# Altium PCB UKU205.PcbDoc (part 3 of 3)
Units mm, origin at the board's own origin, x right, y up, seen from the top; angles counter-clockwise.
Board outline 374.65 x 264.35 mm, 2 copper layers (Top Layer, Bottom Layer); 276 components, 443 nets, 1000 pads, 796 vias.
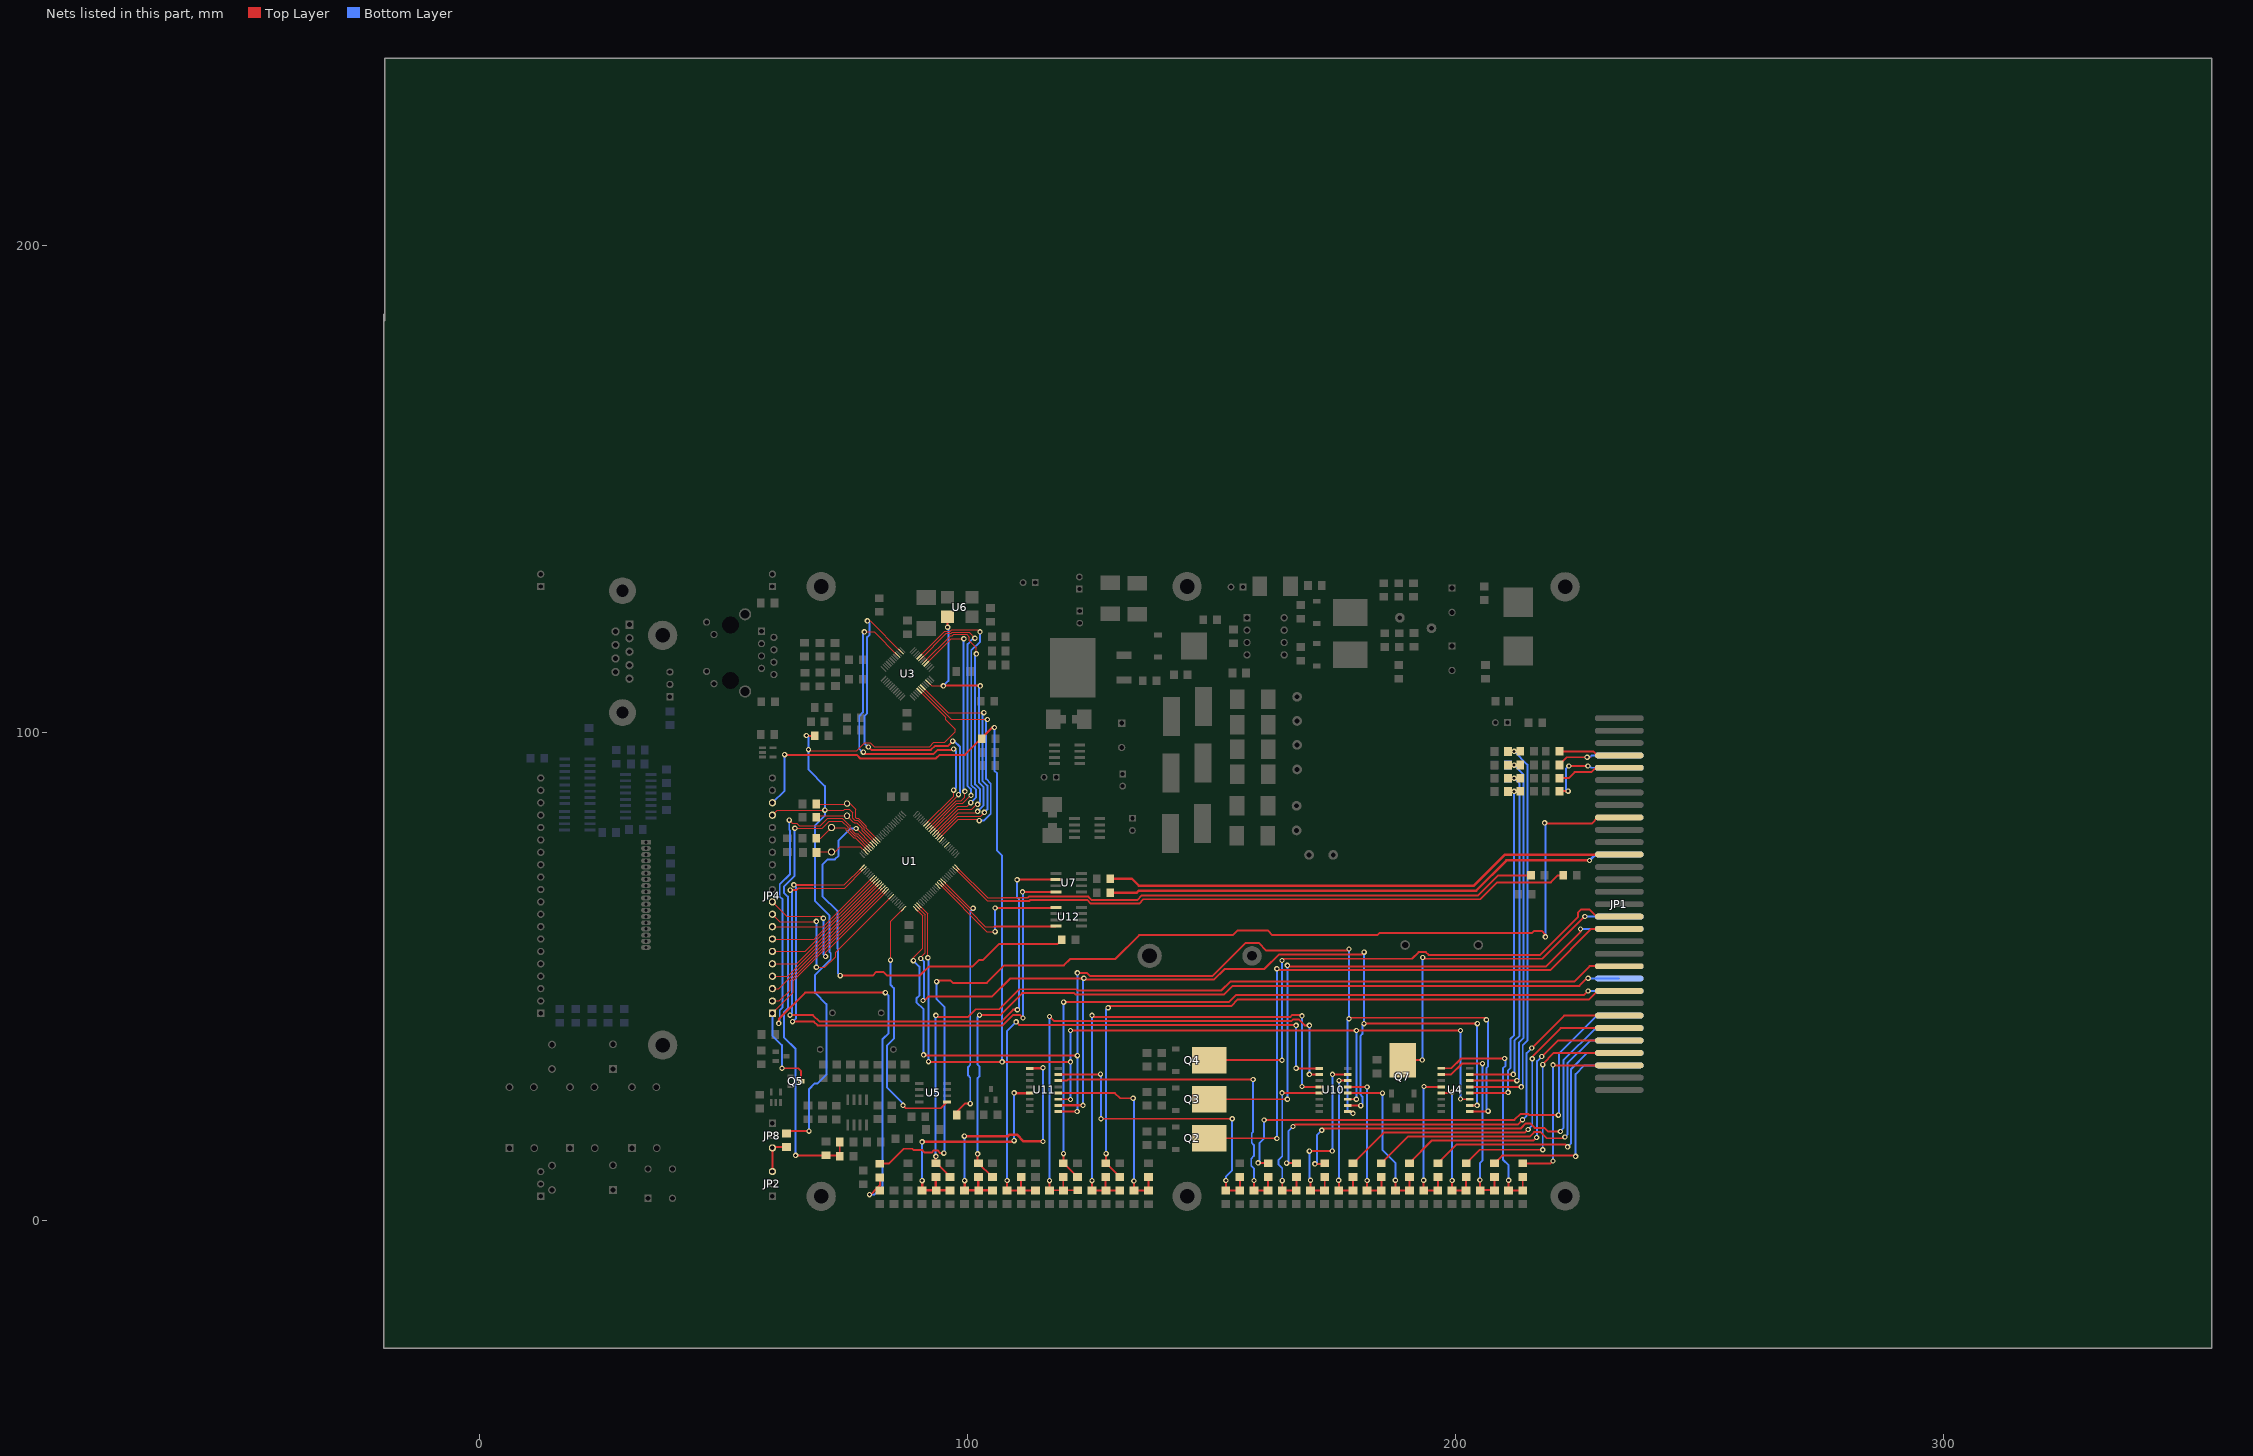
[diagram p3: the nets of this part, all layers, seen from the top]

## Via types
v1: diameter 1.1, hole 0.6, Top Layer to Bottom Layer, 795 vias
v2: diameter 3, hole 2, Top Layer to Bottom Layer, 1 vias

## Nets (pads, with @x,y where several pads share a name; then routed paths per layer and width w, separated by ;. In a path a pad name is that pad's centre, name@x,y a point inside that pad or via, vN(x,y) a via of type N, cw(c..) or ccw(c..) an arc to the next point about the centre after c; other vN are vias at no path point) (continued)
P1_1: U1.94 U3.4 | length 71.5
  Top Layer w0.25: v1(78.85,120.7) 80.866,120.7 U3.4@85.619,115.948 ; U1.94@91.459,81.337 97.15,87.028 v1(97.15,88.25)
  Top Layer w0.4: v1(78.65,96.05) 79,95.7 93.05,95.7 93.8,96.45 96.85,96.45 v1@97.15,96.75
  Bottom Layer w0.4: v1(78.65,96.05) 78.45,96.05 77.8,96.7 77.8,103.45 78.55,104.2 78.55,120.4 v1(78.85,120.7) ; v1(97.15,88.25) 97.65,88.75 97.65,96.2 v1(97.15,96.7)
P1_4: U1.93 U3.2 | length 75.5
  Top Layer w0.25: v1(79.45,122.95) 80.031,122.95 U3.2@86.326,116.655 ; U1.93@91.812,80.948 98.15,87.286 v1(98.15,87.35)
  Top Layer w0.4: v1(79.65,97.1) 80.25,96.5 92.5,96.5 93.35,97.35 96,97.35 v1(96.95,98.3)
  Bottom Layer w0.4: v1(79.45,122.95) 79.85,122.55 79.85,120.05 79.35,119.55 79.35,103.95 78.85,103.45 78.85,97.9 v1(79.65,97.1) ; v1(96.95,98.3) 97.3,98.3 98.45,97.15 98.45,87.65 v1(98.15,87.35)
P1_8: U1.92 U3.40 | length 52.3
  Top Layer w0.25: U3.40@91.523,114.18 96.643,119.3 v1(99.25,119.3) ; U1.92@92.166,80.594 97.672,86.1 98.75,86.1 99.45,86.8 v1(99.45,88)
  Bottom Layer w0.4: v1(99.25,119.3) 99.2,119.25 99.2,88.25 v1(99.45,88)
P1_9: U1.91 U3.43 | length 58.1
  Top Layer w0.25: U3.43@90.463,115.24 95.622,120.4 96.616,120.4 96.816,120.6 100.3,120.6 v1(101.5,119.4) ; U1.91@92.519,80.241 97.829,85.55 99.05,85.55 v1(100.7,87.2)
  Bottom Layer w0.4: v1(100.7,87.2) 100.7,88.4 100,89.1 100,118.2 101.2,119.4 v1(101.5,119.4)
P1_10: U1.90 U3.44 | length 61.7
  Top Layer w0.25: U3.44@90.109,115.594 95.315,120.8 96.45,120.8 96.8,121.15 102.1,121.15 v1(102.55,120.7) ; U1.90@92.873,79.887 97.936,84.95 99.9,84.95 v1(100.65,85.7)
  Bottom Layer w0.4: v1(100.65,85.7) 101.75,86.8 101.75,88.3 100.75,89.3 100.75,116.9 102.55,118.7 v1(102.55,120.7)
P1_14: U1.89 U3.41 | length 58.6
  Top Layer w0.25: U3.41@91.17,114.533 96.536,119.9 96.85,119.9 97.15,120.2 99.8,120.2 100.35,119.65 100.35,118.9 101.8,117.45 v1(101.8,116.2) ; U1.89@93.227,79.534 98.043,84.35 100.85,84.35 101.85,85.35 v1(102.05,85.35)
  Bottom Layer w0.4: v1(101.8,116.2) 101.55,115.95 101.55,89.45 102.55,88.45 102.55,85.85 v1(102.05,85.35)
P1_15: U1.88 U3.34 U6.3 | length 62.6
  Top Layer w0.25: U3.34@91.877,110.397 92.623,109.65 v1(95.05,109.65) ; U1.88@93.58,79.18 98.05,83.65 101.8,83.65 v1(102.05,83.9)
  Top Layer w0.4: v1@95.081,109.681 v1@102.531,109.681 ; v1(95.9,121.65) U6.3@95.9,123.7
  Bottom Layer w0.4: v1(95.05,109.65) 96.05,110.65 v1@96.05,121.65 ; v1(102.05,83.9) 103.3,85.15 103.3,88.85 102.3,89.85 102.3,109.35 v1(102.6,109.65)
P1_16: U1.87 U3.31 | length 47.5
  Top Layer w0.25: U3.31@90.816,109.336 96.002,104.15 v1(103.35,104.15) ; U1.87@93.934,78.826 98.007,82.9 102.7,82.9 103.45,83.65 v1(103.45,83.7)
  Bottom Layer w0.4: v1(103.35,104.15) 103.05,103.85 103.05,90.2 104.05,89.2 104.05,84.3 v1(103.45,83.7)
P1_17: U1.86 U3.30 | length 48.8
  Top Layer w0.25: U3.30@90.463,108.983 96.695,102.75 v1(104.05,102.75) ; U1.86@94.287,78.473 98.114,82.3 102.1,82.3 v1(102.4,82)
  Bottom Layer w0.4: v1(102.4,82) 103.35,82 104.75,83.4 104.75,89.6 103.8,90.55 103.8,102.5 v1(104.05,102.75)
P1_18: JP4.8 U1.32 | length 24.7
  Top Layer w0.25: JP4.8@60,60.28 70.437,60.28 U1.32@80.499,70.341
P1_19: JP4.7 U1.33 | length 25.9
  Top Layer w0.25: JP4.7@60,57.74 68.604,57.74 U1.33@80.852,69.988
P1_20: JP4.6 U1.34 | length 27.2
  Top Layer w0.25: JP4.6@60,55.2 66.772,55.2 U1.34@81.206,69.634
P1_21: JP4.5 U1.35 | length 28.4
  Top Layer w0.25: JP4.5@60,52.66 64.939,52.66 U1.35@81.559,69.281
P1_22: JP4.4 U1.36 | length 29.7
  Top Layer w0.25: JP4.4@60,50.12 63.106,50.12 U1.36@81.913,68.927
P1_23: JP4.3 U1.37 | length 31
  Top Layer w0.25: JP4.3@60,47.58 61.273,47.58 U1.37@82.266,68.573
P1_24: JP4.2 U1.38 | length 33.3
  Top Layer w0.25: JP4.2@60,45.04 61.39,45.04 63.6,47.25 63.6,49.2 U1.38@82.6,68.2
P1_25: JP4.1 Q5.3 U1.39 | length 53.2
  Top Layer w0.25: JP4.1@60,42.5 64.3,46.8 64.3,49.193 U1.39@82.973,67.866
  Top Layer w0.4: v1(61.95,31.25) 65.3,31.25 65.895,30.655 Q5.3@65.895,28.594
  Bottom Layer w0.4: JP4.1@60,42.5 60,37.95 61.95,36 v1(61.95,31.25)
P1_26: JP4.10 U1.40 | length 38.4
  Top Layer w0.25: JP4.10@60,65.36 62.91,62.45 70,62.45 v1(70.45,62) ; v1(70.9,54.15) 70.9,55.05 83.327,67.477 U1.40@83.327,67.513
  Bottom Layer w0.4: v1(70.45,62) 70.45,54.6 v1(70.9,54.15)
P1_27: JP4.9 U1.43 | length 41.1
  Top Layer w0.25: JP4.9@60,62.82 61.52,61.3 69.05,61.3 v1(69,61.35) ; v1(69,51.95) 70.75,51.95 72.95,54.15 72.95,55.014 U1.43@84.388,66.452
  Bottom Layer w0.4: v1(69,51.95) v1(69,61.35)
P1_30: C25.2 R66.2 R67.1 U1.21 | length 99.7
  Top Layer w0.25: v1(64.6,80.45) 70.2,80.45 71.65,81.9 74.243,81.9 75.5,80.643 75.5,80.234 76.834,78.9 77.243,78.9 U1.21@79.743,76.4
  Top Layer w0.4: v1(64.75,13.4) 64.8,13.4 64.812,13.412 73.738,13.412 73.8,13.475 R66.2@73.8,16.2
  Bottom Layer w0.4: v1(64.6,80.45) 64.55,80.45 64.55,70.7 62.35,68.5 62.35,67.25 63.15,66.45 63.15,43.55 62.4,42.8 62.4,37.55 64.75,35.2 v1(64.75,13.4)
P1_31: R16.1 R25.1 U1.20 | length 137.1
  Top Layer w0.25: v1(63.45,82.1) 64.05,81.5 64.95,81.5 65.5,80.95 69.85,80.95 71.35,82.45 74.45,82.45 74.45,82.4 75.573,81.278 75.9,80.95 75.9,80.4 77,79.3 77.55,79.3 77.695,79.155 U1.20@80.145,76.705
  Top Layer w0.4: v1(61.3,40.45) 61.3,41.35 66.7,46.75 v1(83.15,46.75) ; v1(79.9,5.35) 80.107,5.35 81.481,6.725 82.007,7.25 R25.1@82.007,8.888
  Bottom Layer w0.4: v1(61.3,40.45) 61.5,40.65 61.5,43.15 62.1,43.75 62.1,65.85 61.5,66.45 61.5,68.95 63.6,71.05 63.6,79.95 63.45,80.1 v1(63.45,82.1) ; v1(79.9,5.35) 80.9,5.35 82.6,7.05 82.6,37.25 83.8,38.45 83.8,46.1 v1(83.15,46.75)
P2_0: R54.1 U1.75 | length 122.8
  Top Layer w0.25: U1.75@97.823,72.463 104.085,66.2 107.1,66.2
  Top Layer w0.4: 107.1,66.2 112.3,66.2 112.55,66.45 124.75,66.45 125.5,65.7 134.75,65.7 135.75,66.7 204.65,66.7 208.743,70.793 R54.1@215.488,70.793
P2_1: R55.1 U1.74 | length 130.1
  Top Layer w0.25: U1.74@97.469,72.109 104.028,65.55 107.1,65.55
  Top Layer w0.4: 107.1,65.55 112.65,65.55 112.85,65.75 124.5,65.75 125.25,65 135.15,65 136.05,65.9 205.1,65.9 208.55,69.35 219.55,69.35 220.993,70.793 R55.1@222.088,70.793
P2_6: R34.1 U1.67 | length 53.2
  Top Layer w0.25: U1.67@94.994,69.634 100.578,64.05 v1(101.15,64.05)
  Top Layer w0.4: R34.1@97.788,21.693 97.788,22.338 99.45,24 v1(100.55,24)
  Bottom Layer w0.4: v1(100.55,24) 100.55,29.35 100.1,29.8 100.1,31.5 100.55,31.95 100.55,63.45 v1(101.15,64.05)
P2_7: U1.66 U12.4 | length 27.1
  Top Layer w0.25: U1.66@94.65,69.3 94.655,69.295 100.45,63.5 103.658,60.292 105.558,60.292
  Top Layer w0.4: 105.55,60.3 105.558,60.292 U12.4@118.039,60.292
P2_8: U1.65 U12.1 | length 32.6
  Top Layer w0.25: U1.65@94.273,68.927 U1.65@94.287,68.927 103.964,59.25 v1(105.65,59.25)
  Top Layer w0.4: v1(105.652,64.102) U12.1@118.039,64.102
  Bottom Layer w0.4: v1(105.65,59.25) 105.65,64.1 v1(105.652,64.102)
P2_9: U1.64
P2_10: JP4.18 R82.2 U1.53 U4.11 U10.11 U11.11 | length 316.5
  Top Layer w0.25: U1.53@90.045,64.684 91.85,62.879 v1(91.85,53.9)
  Top Layer w0.4: v1(62.5,95.55) 62.55,95.5 77.25,95.5 78,94.75 93.5,94.75 94.25,95.5 99.45,95.5 105.05,101.1 v1(105.5,101.1) ; v1(92,32.6) 92.05,32.55 v1(121.1,32.55) ; U11.11@118.625,24.895 v1@121.055,24.895 ; v1(121.1,39) v1(201.05,39) ; U10.11@177.925,24.895 179.695,24.895 v1(179.7,24.9) ; v1(201.05,24.95) 201.098,24.902 U4.11@202.92,24.902
  Bottom Layer w0.4: JP4.18@60,85.7 JP4.18@60,85.68 62.5,88.18 v1(62.5,95.55) ; v1(91.85,53.9) 92,53.75 v1(92,32.6) ; v1(105.5,101.1) 105.5,92.25 106.05,91.7 106.05,75.85 107.1,74.8 v1(107.1,32.55) ; v1(121.1,24.85) v1(121.1,39) ; v1(179.7,24.9) v1(179.7,39) ; v1(201.05,24.95) v1(201.05,39)
P2_11: U1.52 U4.10 U10.10 U11.10 | length 223.2
  Top Layer w0.25: U1.52@89.691,64.331 91.3,62.722 91.3,54.95 90.4,54.05 v1(90.4,53.75)
  Top Layer w0.4: v1@90.9,44.9 92,46 105.05,46 108.7,49.65 123.5,49.65 123.75,49.4 150.5,49.4 152.7,51.6 160.85,51.6 163.85,54.6 180.85,54.6 v1(181.3,55.05) ; U10.10@177.95,23.65 178,23.6 v1(180.6,23.6) ; v1(181.25,40.4) v1(204.5,40.4) ; U4.10@202.92,23.632 204.432,23.632 v1(204.45,23.65)
  Top Layer w0.5: U11.10@118.625,23.625 123.625,23.625 v1(123.65,23.65)
  Bottom Layer w0.4: v1(90.4,53.75) 91.1,53.05 91.1,45.1 v1@90.9,44.9 ; v1(123.65,23.65) 123.65,49.5 v1(123.85,49.7) ; v1(180.6,23.6) 180.95,23.95 180.95,25.45 180.5,25.9 180.5,37.85 180.95,38.3 180.95,40.1 v1(181.25,40.4) ; v1@181.234,40.384 181.234,54.984 v1(181.3,55.05) ; v1(204.45,23.65) 204.45,40.35 v1(204.5,40.4)
  other v1: 90.85,45.15
P2_12: U1.51 U4.9 U10.9 U11.9 | length 243.4
  Top Layer w0.25: v1(88.9,53.3) 88.9,53.95 90.8,55.85 90.8,62.515 U1.51@89.337,63.977
  Top Layer w0.4: v1(91,34) 91.15,33.85 v1(122.5,33.85) ; U11.9@118.55,22.35 122.4,22.35 v1(122.45,22.4) ; v1(122.5,50.8) 124.45,50.8 125.1,50.15 150.2,50.15 157,56.95 159.65,56.95 161.25,55.35 177.85,55.35 v1(178.2,55.7) ; U10.9@177.925,22.355 178.645,22.355 v1(179,22) ; v1(178.2,41.4) 178.4,41.6 205.95,41.6 v1(206.35,41.2) ; U4.9@202.92,22.362 206.612,22.362 v1(206.7,22.45)
  Bottom Layer w0.4: v1(88.9,53.3) 90.1,52.1 90.1,46.15 89.5,45.55 89.5,44.8 91,43.3 v1(91,34) ; v1(122.45,22.4) 122.5,22.45 v1(122.5,50.8) ; v1(178.2,55.7) v1(178.2,41.4) 177.85,41.05 177.85,22.7 178.55,22 v1(179,22) ; v1(206.35,41.2) 206.7,40.85 206.7,31.65 206.35,31.3 206.35,22.8 v1(206.7,22.45)
P2_13: U1.50 U5.1 | length 53.5
  Top Layer w0.25: v1(84.2,53.4) 84.25,53.45 84.25,61.365 U1.50@86.863,63.977
  Top Layer w0.4: v1(86.75,23.65) 87.35,23.05 94.506,23.05 U5.1@95.796,24.34
  Bottom Layer w0.4: v1(84.2,53.4) 84.2,48.4 84.9,47.7 84.9,37.3 83.45,35.85 83.45,27.35 86.75,24.05 v1(86.75,23.65)
P3_25: U1.27 U7.2 | length 125.9
  Top Layer w0.25: 68.25,68.15 74.772,68.15 U1.27@78.731,72.109
  Top Layer w0.4: v1(63.6,42.15) 68.3,42.15 69.65,40.8 106.9,40.8 109.35,43.25 v1(110.2,43.25) ; v1(63.65,67.75) 64.9,67.75 65.3,68.15 68.25,68.15 ; v1(110.15,69.9) 110.182,69.932 U7.2@118.139,69.932
  Bottom Layer w0.4: v1(63.6,42.15) 64,42.55 64,67.4 v1(63.65,67.75) ; v1(110.15,69.9) 110.15,66.3 110.55,65.9 110.55,43.6 v1(110.2,43.25)
P3_26: U1.26 U7.4 | length 125.5
  Top Layer w0.25: 68.3,68.85 74.765,68.85 U1.26@78.377,72.463
  Top Layer w0.4: v1(64.1,40.8) 68.5,40.8 69.25,40.05 107.2,40.05 109.35,42.2 110.7,42.2 v1(111.35,41.55) ; v1(64.4,68.85) 68.3,68.85 ; v1(111.25,67.4) 111.258,67.392 U7.4@118.139,67.392
  Bottom Layer w0.4: v1(64.1,40.8) 64.85,41.55 64.85,68.4 v1(64.4,68.85) ; v1(111.25,67.4) 111.35,67.3 v1(111.35,41.55)
P4_28: U1.82
P4_29: U1.85
PROG_RESET: 
PROG_SET: 
PWM1: JP1.23 R40.1 | length 107.5
  Top Layer w0.5: R40.1@129.262,70.107 133.693,70.107 135.1,68.7 203.8,68.7 210.15,75.05 JP1.23@233.5,75.05
PWM2: JP1.24 R41.1 | length 107.6
  Top Layer w0.5: R41.1@129.262,67.207 134.607,67.207 135.05,67.65 204.25,67.65 210.45,73.85 v1(227.5,73.85)
  Bottom Layer w0.5: v1(227.5,73.85) 228.725,75.075 JP1.24@233.589,75.075
R1: JP1.35 Q2.4 | length 122.6
  Top Layer w0.4: Q2.4@149.521,16.903 149.524,16.9 163.4,16.9 163.45,16.85 v1(163.4,16.85) ; v1(163.4,51.65) 163.7,51.35 219.4,51.35 227.875,59.825 JP1.35@233.589,59.825
  Bottom Layer w0.4: v1(163.4,16.85) v1(163.4,51.65)
R2: JP1.36 Q3.4 | length 115.1
  Top Layer w0.4: Q3.4@149.521,24.903 157.597,24.903 157.6,24.9 v1(165.55,24.9) ; v1(165.55,52.35) 165.75,52.15 218.6,52.15 225.65,59.2 v1(225.65,59.8)
  Bottom Layer w0.4: v1(165.55,24.9) v1(165.55,52.35) ; v1(225.65,59.8) 225.675,59.825 JP1.36@233.589,59.825
R3: JP1.33 Q4.4 | length 110.3
  Top Layer w0.4: Q4.4@149.521,32.903 156.547,32.903 156.55,32.9 v1(164.45,32.9) ; v1(164.45,53.35) 164.8,53.7 191.1,53.7 192.45,55.05 193.95,55.05 194.5,54.5 217.35,54.5 225.15,62.3 225.15,63.2 225.7,63.75 227.5,63.75 228.85,62.4 JP1.33@233.55,62.4
  Bottom Layer w0.4: v1(164.45,32.9) v1(164.45,53.35)
R4: JP1.34 Q7.4 | length 69.4
  Top Layer w0.4: Q7.4@189.197,32.921 193.171,32.921 v1(193.2,32.95) ; v1(193.3,53.95) 193.55,53.7 217.8,53.7 226.45,62.35 v1(226.55,62.35)
  Bottom Layer w0.4: v1(193.2,32.95) 192.95,32.95 193.3,33.3 v1(193.3,53.95) ; v1(226.55,62.35) 226.575,62.325 JP1.34@233.589,62.325
RES: D2.1 JP4.17 R81.1 U1.17 U3.29 | length 164.2
  Top Layer w0.25: JP4.17@60,83.14 60.96,84.1 64.25,84.1 64.3,84.15 71.55,84.15 71.6,84.1 ; v1(67.4,96.55) 67.4,96.5 67.6,96.3 77.25,96.3 78.95,98 80.1,98 80.9,97.2 92.2,97.2 93.05,98.05 95.35,98.05 97.5,100.2 97.5,100.7 95.55,102.65 95.55,103.188 U3.29@90.109,108.629 ; 71.55,84.1 74.6,84.1 74.8,84.3 75.75,84.3 76.45,83.6 76.45,82.522 76.913,82.058 77.442,82.058 78.85,80.65 78.85,80.122 U1.17@81.206,77.766
  Top Layer w0.4: D2.1@62.65,18.35 v1(67.5,18.35) ; v1@67.443,99.393 R81.1@68.688,99.393
  Bottom Layer w0.4: v1@67.4,99.35 67.4,92.45 70.75,89.1 70.75,83.05 68.75,81.05 68.75,65.5 71.7,62.55 71.7,55.05 71.95,54.8 71.95,53.6 68.75,50.4 68.75,46.7 71.05,44.4 71.05,29.95 69.25,28.15 68.65,28.15 67.5,27 v1(67.5,18.35)
  other v1: 70.75,84.15 66.95,99.45
RES_BUT: D2.2 JP2.3 JP8.3 | length 7.8
  Top Layer w0.4: JP2.3@60,10.08 JP8.3@60,14.92 60.175,15.095 D2.2@62.909,15.095
RTCX1: C40.2 U1.16 Y2.1 | length 16.9
  Top Layer w0.25: C40.2@69.05,85.4 75.303,85.4 Y2.1@75.401,85.499 ; Y2.1@75.305,85.499 75.901,85.499 77.038,84.362 77.038,82.641 77.22,82.458 77.607,82.458 79.25,80.816 79.25,80.429 U1.16@81.559,78.119
RTCX2: C41.2 U1.18 Y2.2 | length 14.5
  Top Layer w0.25: C41.2@69.05,82.9 69.149,82.999 Y2.2@75.305,82.999 76.408,81.895 76.408,81.892 76.75,81.55 77.25,81.55 78.367,80.433 78.367,79.936 80.852,77.451 U1.18@80.852,77.412
RX0: 
SK1: JP1.7 R92.1 | length 12.5
  Top Layer w0.4: R92.1@221.309,96.214 228.236,96.214 229.05,95.4 JP1.7@233.45,95.4
SK2: JP1.8 R94.1 | length 13.1
  Top Layer w0.4: R94.1@221.3,93.45 222.85,95 227.6,95
  Bottom Layer w0.4: 227.6,95 227.975,95.375 JP1.8@233.589,95.375
  other v1: 227,95
SK3: JP1.9 R96.1 | length 13.2
  Top Layer w0.4: R96.1@221.309,90.714 223.214,90.714 224.45,91.95 227.85,91.95 228.75,92.85 JP1.9@233.589,92.85
SK4: JP1.10 R98.1 | length 17.3
  Top Layer w0.4: R98.1@221.3,88.05 222.55,88.05 v1@222.6,88 ; v1(223.25,93.2) v1@227.5,93.2
  Bottom Layer w0.4: v1@222.6,88 222.55,88 222.575,88.025 222.65,88.1 222.65,92.6 v1(223.25,93.2) ; v1@227.5,93.2 227.85,92.85 JP1.10@233.589,92.85
  other v1: 223.1,88.05 227.15,93.2
T1: JP1.45 R8.2 R17.1 | length 142.2
  Top Layer w0.4: v1@128.4,13.4 128.4,11.75 R17.1@131.15,9 ; v1(128.8,43.65) 129.15,44 154.05,44 155.4,45.35 227.4,45.35 229.15,47.1 JP1.45@233.589,47.1
  Bottom Layer w0.4: v1@128.4,13.4 128.4,43.25 v1(128.8,43.65)
  other v1: 128.4,13.75
T2: JP1.46 R9.2 R18.1 | length 152.1
  Top Layer w0.4: v1@119.65,13.55 119.65,11.65 119.8,11.65 R18.1@122.55,8.9 ; v1(119.7,44.8) 119.75,44.85 153.6,44.85 155,46.25 226.35,46.25 v1(227.2,47.1)
  Bottom Layer w0.4: v1@119.65,13.55 119.65,44.75 v1(119.7,44.8) ; v1(227.2,47.1) JP1.46@233.589,47.1
  other v1: 119.65,13.75
T3: JP1.43 R11.2 R19.1 | length 161.4
  Top Layer w0.4: R11.2@110.95,11.8 111.05,11.8 R19.1@113.9,8.95 ; R11.2@111.014,11.791 111.014,13.464 v1@111.05,13.5 ; v1(112.5,45.45) 112.9,45.85 121.6,45.85 121.85,45.6 153.15,45.6 154.7,47.15 225.55,47.15 226.7,48.3 227.8,48.3 229.15,49.65 JP1.43@233.589,49.65
  Bottom Layer w0.4: v1@111.05,13.5 111.05,38.75 112.5,40.2 v1(112.5,45.45)
  other v1: 111.05,13.7
T3: 
T3: 
T3: 
T4: JP1.44 R115.1 R119.2 | length 169.6
  Top Layer w0.4: v1@102.05,13.4 102.05,11.9 102.15,11.8 102.187,11.763 R119.2@102.25,11.7 ; R119.2@102.214,11.791 105.014,8.991 R115.1@105.114,8.991 ; v1(102.45,42.15) 106.7,42.15 111.2,46.65 121.85,46.65 122.15,46.35 152.55,46.35 154.35,48.15 225.4,48.15 226.95,49.7 v1(227.2,49.7)
  Bottom Layer w0.4: v1@102.05,13.4 102.05,29.25 102.4,29.6 102.4,31.65 102.05,32 102.05,41.75 v1(102.45,42.15) ; v1(227.2,49.7) 227.25,49.65 JP1.44@233.589,49.65
  other v1: 102.05,13.7
T5: JP1.41 R116.1 R120.2 | length 179.3
  Top Layer w0.4: v1@93.4,13.45 93.45,13.4 93.45,11.75 93.656,11.75 R116.1@96.414,8.991 ; v1(93.5,42.1) 93.85,41.75 100.05,41.75 101.65,43.35 106.5,43.35 110.6,47.45 122.25,47.45 122.5,47.2 152.05,47.2 153.85,49 224.35,49 227.525,52.175 JP1.41@233.589,52.175
  Bottom Layer w0.4: v1@93.4,13.45 93.4,42 v1(93.5,42.1)
  other v1: 93.5,13.2
TD1: 
TX0: 
TX0: 
TX0: 
TX0: 
TX0: 
TX0: 
TX0: 
TX0: 
TX0: 
TX0: 
TX0: 
TX0: 
TX0: 
TX0: 
TX0: 
TX0: 
TX0: 
TX0: 
TX0: 
TX0: 
TX0: 
TX0: 
TX0: 
TX0: 
TX0: 
TX0: 
TX0: 
TX0: 
TX0: 
TX0: 
TX0: 
TX0: 
TX0: 
TX0: 
TX0: 
TX0: 
TX0: 
TX0: 
TX0: 
TX0: 
TX0: 
TX0: 
TX0: 
TX0: 
TX0: 
TX0: 
TX0: 
TX0: 
TX0: 
TX0: 
TX0: 
TX0: 
TX0: 
TX0: 
TX0: 
TX0: 
TX0: 
TX0: 
TX0: 
TX0: 
TX0: 
TX0: 
TX0: 
TX0: 
TX0: 
TX0: 
TX0: 
TX0: 
TX0: 
TX0: 
TX0: 
TX0: 
TX0: 
TX0: 
TX0: 
TX0: 
TX0: 
TX0: 
TX0: 
TX0: 
TX0: 
TX0: 
TX0: 
TX0: 
TX0: 
TX0: 
TX0: 
TX0: 
TX0: 
TX0: 
TX0: 
U1: JP1.57 R20.2 | length 39.8
  Top Layer w0.4: R20.2@213.75,11.7 219.45,11.7 v1(220,12.25) ; v1(220,31.95) 220.1,31.85 JP1.57@233.589,31.85
  Bottom Layer w0.4: v1(220,12.25) v1(220,31.95)
U2: 
U2: 
U2: 
U2: 
U2: 
U2: 
U2: 
U2: 
U2: 
U2: JP1.58 R21.2 | length 43.9
  Top Layer w0.4: R21.2@208.007,11.788 209.569,13.35 224.5,13.35 v1(224.65,13.2)
  Bottom Layer w0.4: v1(224.65,13.2) 224.65,30.05 226.45,31.85 JP1.58@233.589,31.85
U3: JP1.55 R22.2 | length 51
  Top Layer w0.4: R22.2@202.207,11.788 204.969,14.55 v1(217.9,14.55) ; v1(217.9,32) 217.9,32.1 220.2,34.4 JP1.55@233.589,34.4
  Bottom Layer w0.4: v1(217.9,14.55) v1(217.9,32)
U4: JP1.56 R83.2 | length 55.9
  Top Layer w0.4: R83.2@196.4,11.8 200.2,15.6 222.55,15.6 v1(223,15.15)
  Bottom Layer w0.4: v1(223,15.15) 223.7,15.85 223.7,31.1 227,34.4 JP1.56@233.589,34.4
U5: JP1.53 R84.2 | length 62.5
  Top Layer w0.4: R84.2@190.6,11.85 195.2,16.45 216.05,16.45 v1(216.65,17.05) ; v1(217.7,33.65) 220.975,36.925 JP1.53@233.589,36.925
  Bottom Layer w0.4: v1(216.65,17.05) 216.75,17.15 216.75,32.7 v1(217.7,33.65)
U6: JP1.54 R85.2 | length 68.8
  Top Layer w0.4: R85.2@184.814,11.791 190.273,17.25 215.25,17.25 216.15,18.15 217.45,18.15 218.7,16.9 222.2,16.9 v1(222.45,17.15)
  Bottom Layer w0.4: v1(222.45,17.15) 222.95,17.65 222.95,32.25 227.625,36.925 JP1.54@233.589,36.925
U7: JP1.51 R86.2 | length 74.3
  Top Layer w0.4: R86.2@179.014,11.791 185.273,18.05 214.25,18.05 v1(214.9,18.7) ; v1(215.75,33.2) 215.75,33.65 221.575,39.475 JP1.51@233.589,39.475
  Bottom Layer w0.4: v1(214.9,18.7) 215.75,19.55 v1(215.75,33.2)
U8: JP1.52 R87.2 | length 88.1
  Top Layer w0.4: v1@171.65,11.65 173.073,11.65 R87.2@173.214,11.791 ; v1(172.6,18.55) 172.6,18.65 172.85,18.9 213.4,18.9 214.45,19.95 215.35,19.95 216.25,19.05 218.2,19.05 218.95,18.3 v1(221.5,18.3)
  Bottom Layer w0.4: v1@171.65,11.65 171.65,17.6 v1(172.6,18.55) ; v1(221.5,18.3) 222.15,18.95 222.15,32.85 228.775,39.475 JP1.52@233.589,39.475
  other v1: 171.2,11.65
U9: JP1.49 R88.2 | length 93.4
  Top Layer w0.4: v1@165.75,11.8 165.759,11.791 R88.2@167.414,11.791 ; v1(166.7,19.3) 167.1,19.7 212.75,19.7 v1(213.75,20.7) ; v1(215.65,35.4) 222.3,42.05 JP1.49@233.589,42.05
  Bottom Layer w0.4: v1@165.75,11.8 165.75,18.35 v1(166.7,19.3) ; v1(213.75,20.7) 214.6,21.55 214.6,34.35 v1(215.65,35.4)
  other v1: 165.4,11.8
U10: JP1.50 R91.2 | length 100.3
  Top Layer w0.4: v1@159.85,11.85 159.909,11.791 R91.2@161.614,11.791 ; v1(160.8,20.65) 212.1,20.65 213.35,21.9 214.9,21.9 215.15,21.65 v1(221.1,21.65) ; R91.2@161.55,11.7 R91.2@161.628,11.778
  Bottom Layer w0.4: v1@159.85,11.85 159.85,15.95 160.8,16.9 v1(160.8,20.65) ; v1(221.1,21.65) 221.2,21.75 221.2,34.25 229,42.05 JP1.50@233.589,42.05
  other v1: 159.55,11.85
UAKB: 
UAKB: 
UAKB: 
UAKB: 
UAKB: 
UAKB: 
UAKB: 
UAKB: 
UAKB: 
UAKB: 
UAKB: 
UAKB: 
UAKB: 
UAKB: 
UAKB: 
UAKB: 
UAKB: 
UAKB: 
UAKB: 
UAKB: 
UAKB: 
UAKB: 
UAKB: 
UAKB: 
UAKB: 
UAKB: 
UAKB: 
UAKB: 
UI1: C4.1 R6.1 R23.2 U11.15 | length 65.7
  Top Layer w0.4: U11.15@118.625,29.975 127.175,29.975 v1(127.25,30.05) ; v1(127.35,20.9) v1(154.25,20.9) ; v1@152.95,8.05 152.95,6.2 152.932,6.2 152.919,6.188 R23.2@155.807,6.188 R6.1@155.807,8.988
  Bottom Layer w0.4: v1(127.25,30.05) 127.35,29.95 v1(127.35,20.9) ; v1@152.95,8.05 152.95,9 154.25,10.3 v1(154.25,20.9)
  other v1: 152.95,8.25
UI2: C5.1 R7.1 R24.2 U11.12 | length 40.5
  Top Layer w0.4: U11.12@118.625,26.165 130.185,26.165 131.25,25.1 v1(133.95,25.1) ; v1@134.1,8 134.102,7.998 C5.1@134.102,6.205 134.119,6.188 R24.2@137.107,6.188 R7.1@137.107,8.988
  Bottom Layer w0.4: v1(133.95,25.1) 134.1,24.95 v1@134.1,8
  other v1: 134.1,8.15
US: JP1.17 R25.2 | length 221.3
  Top Layer w0.4: R25.2@82.007,11.688 83.838,11.688 86.9,14.75 88.7,14.75 89,14.45 90.75,14.45 91.25,13.95 92.65,13.95 93.1,14.4 93.85,14.4 94.4,13.85 v1(95.15,13.85) ; v1(93.65,49) 93.85,49.2 96.55,49.2 97,48.75 103.95,48.75 107.55,52.35 119.75,52.35 121.05,53.65 130.25,53.65 135.15,58.55 154.4,58.55 155.3,59.45 161.6,59.45 162.5,58.55 184,58.55 184.45,59 215.75,59 216.15,59.4 217.7,59.4 218.45,58.65 v1(218.45,58.2) ; v1(218.3,81.55) 218.45,81.4 227.95,81.4 229.225,82.675 JP1.17@233.589,82.675
  Bottom Layer w0.4: v1(93.65,49) 93.65,45.4 95.3,43.75 95.3,14 v1(95.15,13.85) ; v1(218.3,81.55) 218.45,81.4 v1(218.45,58.2)
US1: 
US1: 
US1: 
US1: 
US1: 
US1: 
US1: 
US1: 
US1: 
US1: 
US1: 
US1: 
US1: 
US1: 
US1: 
US1: 
US1: 
US1: 
US1: 
US1: 
US1: 
US1: 
US1: 
US1: 
US1: 
US1: 
US1: 
US1: 
US1: 
US1: 
US1: 
US1: 
USK1: C50.1 R93.2 R111.2 U4.13 | length 84.7
  Top Layer w0.4: U4.13@202.92,27.442 213.492,27.442 v1(213.5,27.45) ; R111.2@210.85,96.2 210.864,96.214 R93.2@213.309,96.214
  Bottom Layer w0.4: C50.1@210.791,96.186 212.036,96.186 v1(212.05,96.2) 214.75,93.5 214.75,36.9 213.8,35.95 213.8,27.75 v1(213.5,27.45)
USK2: C51.1 R95.2 R112.2 U4.14 | length 79.5
  Top Layer w0.4: U4.14@202.92,28.712 202.932,28.7 v1(212.6,28.7) ; R112.2@210.791,93.386 210.82,93.414 R95.2@213.309,93.414
  Bottom Layer w0.4: C51.1@210.791,93.386 212.036,93.386 v1(212.05,93.4) 213.95,91.5 213.95,37.45 213.05,36.55 213.05,29.15 v1(212.6,28.7)
USK3: C52.1 R97.2 R113.2 U4.15 | length 74.4
  Top Layer w0.4: U4.15@202.92,29.982 202.938,30 v1(211.85,30) ; R113.2@210.791,90.686 210.82,90.714 R97.2@213.309,90.714
  Bottom Layer w0.4: C52.1@210.791,90.686 212.036,90.686 v1(212.05,90.7) 213.15,89.6 213.15,37.95 212.15,36.95 212.15,30.35 211.85,30.05 v1(211.85,30)
USK4: C53.1 R99.2 R114.2 U4.12 | length 73.9
  Top Layer w0.4: U4.12@202.922,26.172 210.672,26.172 v1(210.8,26.3) ; R114.2@210.791,87.986 210.82,88.014 R99.2@213.309,88.014
  Bottom Layer w0.4: C53.1@210.791,87.986 v1@212.036,87.986 ; v1(210.8,26.3) 210.8,30.8 211.25,31.25 211.25,37.25 212.036,38.036 v1@212.036,87.986 ; v1(212.05,88) v1@212.036,87.986
UT1: C6.1 D3.2 R8.1 R26.2 U10.4 | length 105.9
  Top Layer w0.4: C6.1@125.494,6.205 125.494,7.994 v1@125.5,8 ; v1(125.5,42.1) 125.85,41.75 166.1,41.75 166.5,42.15 168.4,42.15 v1(168.55,42) ; C6.1@125.55,6.2 125.559,6.191 R26.2@131.214,6.191 ; R8.1@128.314,8.991 128.314,6.227 D3.2@128.35,6.191 ; v1(168.55,27.5) 168.615,27.435 U10.4@172.075,27.435
  Bottom Layer w0.4: v1@125.5,8 v1(125.5,42.1) ; v1(168.55,27.5) v1(168.55,42)
  other v1: 125.5,8.2
UT2: C7.1 D4.2 R9.1 R27.2 U10.2 | length 110.5
  Top Layer w0.4: C7.1@116.75,6.25 116.759,6.241 R27.2@122.564,6.241 ; C7.1@116.794,6.205 116.794,7.744 116.8,7.75 v1@116.8,7.85 ; v1(116.8,41.85) 117.7,40.95 166.45,40.95 166.75,41.25 167.9,41.25 169.1,40.05 v1(170.05,40.05) ; D4.2@119.6,6.3 119.614,6.314 R9.1@119.614,8.991 ; v1(170.05,30) 170.075,29.975 U10.2@172.075,29.975
  Bottom Layer w0.4: v1@116.8,7.85 v1(116.8,41.85) ; v1(170.05,30) v1(170.05,40.05)
  other v1: 116.8,8.2
UT3: C8.1 D5.2 R11.1 R28.2 U10.1 | length 115.2
  Top Layer w0.4: v1@108.1,8.1 108.1,6.223 108.1,6.2 R28.2@113.8,6.2 ; v1(109.95,40.75) 110.55,40.15 167.3,40.15 v1@167.35,40.2 ; D5.2@110.983,6.197 110.983,8.96 R11.1@111.014,8.991 ; v1(167.35,31.25) 167.355,31.245 U10.1@172.075,31.245
  Bottom Layer w0.4: v1@108.1,8.1 108.1,38.9 v1(109.95,40.75) ; v1(167.35,31.25) v1@167.35,40.2
  other v1: 108.1,8.25 167.35,40.05
UT4: C54.1 D1.2 R117.2 R119.1 U11.1 | length 54.3
  Top Layer w0.5: v1(99.35,17.35) 108.3,17.35 108.6,17.65 110.1,17.65 111.5,16.25 v1(115.45,16.25) ; C54.1@99.386,6.209 105.109,6.209 R117.2@105.15,6.25 ; C54.1@99.4,6.209 v1@99.4,8.05 ; R119.1@102.214,8.991 102.214,6.286 D1.2@102.25,6.25 ; U11.1@112.775,31.245 115.345,31.245 v1(115.45,31.35)
  Bottom Layer w0.4: v1(99.35,17.35) 99.4,17.3 v1@99.4,8.05 ; v1(115.45,16.25) v1(115.45,31.35)
  other v1: 99.4,8.2
UT5: C55.1 D8.2 R118.2 R120.1 U11.5 | length 50.6
  Top Layer w0.5: v1(90.7,8.2) 90.7,8.15 90.686,8.136 C55.1@90.686,6.209 96.541,6.209 R118.2@96.55,6.2 ; v1(90.7,16.15) 109.3,16.15 v1(109.55,16.4) ; R120.1@93.514,8.991 93.514,6.266 D8.2@93.583,6.197 ; v1(109.55,26.2) 109.585,26.165 U11.5@112.775,26.165
  Bottom Layer w0.4: v1(90.7,8.2) v1(90.7,16.15) ; v1(109.55,16.4) v1(109.55,26.2)
UU1: C1.1 R12.1 R20.1 U4.1 | length 47.4
  Top Layer w0.4: U4.1@197.07,31.252 199.152,31.252 201.15,33.25 v1(210.1,33.25) ; v1@210.9,8.05 210.9,6.207 C1.1@210.902,6.205 210.907,6.2 213.85,6.2 213.807,6.243 R20.1@213.807,8.988
  Bottom Layer w0.4: v1(210.1,33.25) 210.3,33.05 210.3,31.8 209.75,31.25 209.75,12.55 210.9,11.4 v1@210.9,8.05
  other v1: 210.9,8.3
UU2: C2.1 R13.1 R21.1 U4.2 | length 41.4
  Top Layer w0.4: U4.2@197.07,29.982 199.132,29.982 201.35,32.2 v1(205.55,32.2) ; v1@205,8 205,6.2 205.05,6.25 208,6.25 208.007,6.257 R21.1@208.007,8.988
  Bottom Layer w0.4: v1@205,8 205,11.75 205.55,12.3 v1(205.55,32.2)
  other v1: 205,8.35
UU3: C3.1 R15.1 R22.1 U4.5 | length 28.2
  Top Layer w0.4: U4.5@197.07,26.172 199.172,26.172 v1(199.3,26.3) ; v1@199.35,8 199.323,7.973 199.323,6.226 202.207,6.226 R22.1@202.207,8.988
  Bottom Layer w0.4: v1(199.3,26.3) 199.323,26.277 v1@199.323,7.973 ; v1@199.35,8 v1@199.45,8.1
  other v1: 199.323,8.25
UU4: C43.1 R10.1 R83.1 U4.4 | length 30.6
  Top Layer w0.4: v1@193.5,8.05 193.5,6.15 193.559,6.209 R10.1@196.386,6.209 196.414,6.238 R83.1@196.414,8.991 ; v1(193.55,27.5) 193.608,27.442 U4.4@197.07,27.442
  Bottom Layer w0.4: v1@193.5,8.05 193.5,27.45 v1(193.55,27.5)
  other v1: 193.5,8.3
UU5: C44.1 R14.1 R84.1 U10.12 | length 33.9
  Top Layer w0.4: U10.12@177.96,26.2 U10.12@177.925,26.165 177.94,26.15 v1(185.05,26.15) ; v1@187.7,8.05 C44.1@187.7,6.2 190.577,6.2 190.614,6.238 R84.1@190.614,8.991
  Bottom Layer w0.4: v1(185.05,26.15) 185.05,14.5 187.7,11.85 v1@187.7,8.05
  other v1: 187.7,8.3
UU6: C45.1 R74.1 R85.1 U10.13 | length 30.9
  Top Layer w0.4: U10.13@177.925,27.435 181.865,27.435 v1(181.9,27.4) ; v1@181.9,8.05 C45.1@181.9,6.2 184.8,6.2 184.814,6.214 R85.1@184.814,8.991
  Bottom Layer w0.4: v1@181.9,8.05 v1(181.9,27.4)
  other v1: 181.9,8.25
UU7: C46.1 R75.1 R86.1 U10.14 | length 30
  Top Layer w0.4: v1@176.1,8.05 C46.1@176.1,6.2 178.977,6.2 R75.1@178.986,6.209 179.014,6.238 R86.1@179.014,8.991 ; v1(176.15,28.7) 176.155,28.705 U10.14@177.925,28.705
  Bottom Layer w0.4: v1@176.1,8.05 176.1,28.65 v1(176.15,28.7)
  other v1: 176.05,8.3
UU8: C47.1 R76.1 R87.1 U10.15 | length 37.5
  Top Layer w0.4: v1(170.05,14.25) 170,14.25 170.05,14.3 v1(174.75,14.3) ; v1@170.3,8.05 C47.1@170.3,6.2 170.338,6.238 173.214,6.238 R87.1@173.214,8.991 ; v1(174.8,30) U10.15@177.9,30
  Bottom Layer w0.4: v1(170.05,14.25) 170.05,8.3 v1@170.3,8.05 ; v1(174.75,14.3) 174.8,14.35 v1(174.8,30)
  other v1: 170.3,8.3
UU9: C48.1 R77.1 R88.1 U10.5 | length 34
  Top Layer w0.4: v1(164.45,26.2) 164.485,26.165 U10.5@172.075,26.165 ; v1@164.5,8 C48.1@164.5,6.2 164.509,6.209 R77.1@167.386,6.209 ; R88.1@167.414,8.991 167.414,6.236 R77.1@167.45,6.2
  Bottom Layer w0.4: v1(164.45,26.2) 164.5,26.15 164.5,13.2 163.75,12.45 163.75,11.5 164.5,10.75 v1@164.5,8
  other v1: 164.5,8.2
UU10: C49.1 R78.1 R91.1 U11.14 | length 69.2
  Top Layer w0.4: U11.14@118.625,28.705 120.355,28.705 120.6,28.95 v1(158.55,28.95) ; v1@158.7,7.95 C49.1@158.7,6.2 158.738,6.238 161.614,6.238 R91.1@161.614,8.991
  Bottom Layer w0.4: v1(158.55,28.95) 158.55,18.2 158.25,17.9 158.25,15.95 158.7,15.5 158.7,13.3 158.15,12.75 158.15,11.3 158.7,10.75 v1@158.7,7.95
  other v1: 158.7,8.25
VBAT: D6.2 U1.19 | length 89.9
  Top Layer w0.25: v1(77.15,80.407) U1.19@80.499,77.059
  Top Layer w0.4: v1(73.9,50.25) 80.55,50.25 81.3,51 82.75,51 83.45,50.3 90.25,50.3 92.1,52.15 101.05,52.15 102.3,53.4 103.1,53.4 106.45,56.75 118.454,56.75 D6.2@119.295,57.591
  Bottom Layer w0.4: v1(73.9,50.25) 73.4,50.75 73.4,55.75 73.3,55.85 73.3,63.5 70.25,66.55 70.25,72.95 71.35,74.05 72.8,74.05 73.55,74.8 73.55,77.95 76.007,80.407 v1(77.15,80.407) 77.15,80.45 v1@77.107,80.407
VS: JP1.18 R71.2 | length 211.7
  Top Layer w0.4: R71.2@87.807,11.788 v1@87.807,13.193 ; v1(88.65,46.9) 93.25,46.9 94.65,48.3 96.2,48.3 96.7,47.8 104.3,47.8 107.9,51.4 120.05,51.4 121.35,52.7 130.55,52.7 135.5,57.65 154.8,57.65 155.8,58.65 161.2,58.65 162.15,57.7 184.5,57.7 185,58.2 217,58.2 v1(217.05,58.25) ; v1(217.15,82.65) 217.25,82.55 v1@227.45,82.55
  Bottom Layer w0.4: v1@87.807,13.193 89.4,14.787 89.4,43.5 88.65,44.25 v1(88.65,46.9) ; v1(217.05,58.25) 217.05,82.3 217.275,82.525 217.4,82.65 v1(217.15,82.65) ; v1@227.45,82.55 227.575,82.675 JP1.18@233.589,82.675
  other v1: 87.8,13.5 227.3,82.55
VS: 
VS: 
VS: 
VS: 
VS: 
VS: 
VS: 
VS: 
VS: 
VS: 
VS: 
VS: 
VS: 
VS: 
VS: 
VS: 
VS: 
VS: 
VS: 
VS: 
VS: 
VS: 
VS: 
VS: 
VS: 
VS: 
VS: 
VS: 
VS: 
VS: 
XTAL1: C21.2 U1.22 Y1.1 | length 13.4
  Top Layer w0.25: C21.2@68.988,78.393 69.901,78.393 Y1.1@72.1,80.592 74.844,80.592 75.1,80.336 75.1,80.069 76.669,78.5 76.936,78.5 U1.22@79.438,75.998
XTAL2: C31.2 U1.23 Y1.2 | length 11
  Top Layer w0.25: C31.2@69.037,75.494 69.135,75.592 72.842,75.592 73.95,76.7 78.029,76.7 U1.23@79.084,75.645
pads on no net: J2.1 J2.6 J2.8 J2.9 J2.10 J2.11 J301.0 J301.7 JP1.3 JP1.4 JP1.15 JP1.30 JP1.31 JP1.32 JP1.42 U1.1 U1.2 U1.3 U1.4 U1.5 U1.14 U1.24 U1.44 U1.45 U1.48 U1.49 U1.63 U1.68 U1.69 U1.70 U1.73 U1.81 U1.100 U2.18 U3.1 U3.5 U3.6 U3.8 U3.9 U3.10 U3.11 U3.12 U3.25 U3.33 U3.38 U3.42 U3.45 U3.46 U6.1 U7.1 U7.8 U8.3 U8.4 U8.5 U8.6 U9.1 U9.5 U9.8 U11.2 U11.4 U11.13 U12.5 U13.3 U14.11 U14.12 U14.13 U14.14 U15.3 U15.4 U15.5 U15.6 U19.4 U102.4 U102.8
copper on no net: | length 0.4
  Bottom Layer w0.5: -81.85,-36.5 -81.4,-36.5

## Polygon pours and split planes (outlines as drawn)
+3V3 on Top Layer (hatched 90Degree grid 0.1 track 0.3, remove dead copper): 64.5,117.2 64.5,111.3 77.25,111.3 77.25,117.9 64.45,117.9 64.45,116.65 64.55,116.65
NetC103_2 on Top Layer (hatched 90Degree grid 0.1 track 0.3, remove dead copper): 193.55,131.8 193.55,114.65 202.45,114.65 202.45,112.35 207.75,112.35 207.75,131.7 193.5,131.7
GND on Top Layer (hatched 90Degree grid 0.1 track 0.3, remove dead copper): -66.93,107.95 -33.713,76.05 -46.25,63.514 -59.186,76.45 -58.236,76.45 -46.436,88.25 -45.913,88.25
NetJP3_1 on Top Layer (hatched 90Degree grid 0.1 track 0.3, remove dead copper): -1.3,77.9 43.7,77.9 43.7,-1.15 -4.35,-1.15 -4.35,77.9 -0.75,77.9 -0.75,77.85
NetC28_2 on Top Layer (hatched 90Degree grid 0.1 track 0.3, remove dead copper): -1.9,136.8 -1.9,103.3 20.55,103.3 20.55,79.35 43.85,79.35 43.85,137.55 -1.95,137.55 -1.95,136.35 -2,136.35
GND on Top Layer (hatched 90Degree grid 0.1 track 0.3, remove dead copper): 64,116.2 65.043,116.2 64.05,127.12 64.05,110.85 77.7,110.85 77.7,118.35 64,118.35
GND on Top Layer (hatched 90Degree grid 0.1 track 0.3, remove dead copper): 241.75,93.9 211.9,93.9 211.9,108.7 172.5,108.7 172.5,72.35 137,72.35 137,109.85 152.5,109.85 152.5,137.75 49.95,137.75 49.95,-2.55 244.95,-2.55 244.95,93.95 241.45,93.95
GND on Bottom Layer (hatched 90Degree grid 0.1 track 0.3, remove dead copper): 245.1,91.25 211.75,91.25 211.75,108.75 172.55,108.75 172.55,72.35 137,72.35 137,110.15 152.5,110.15 152.5,137.35 50,137.35 50,-2.55 242.35,-2.55 242.35,91.2
GND on Bottom Layer (hatched 90Degree grid 0.1 track 0.3, remove dead copper): 80.314,112.05 87.35,105.014 94.686,112.35 88.036,119 87.878,119 87.673,119.41
GND on Bottom Layer (hatched 90Degree grid 0.1 track 0.3, remove dead copper): 76.214,73.85 88,62.064 99.736,73.8 88.47,85.067 88.123,85.76
+3V3 on Bottom Layer (hatched 90Degree grid 0.1 track 0.3, remove dead copper): 87.55,118.65 80.95,112.05 87.35,105.65 94.05,112.35 87.85,118.55 87.6,118.55
NetC103_2 on Bottom Layer (hatched 90Degree grid 0.1 track 0.3, remove dead copper): 193.55,131.75 193.55,114.7 202.45,114.7 202.45,112.35 207.75,112.35 207.75,131.75
+3V3 on Bottom Layer (hatched 90Degree grid 0.1 track 0.3, remove dead copper): 88,85 76.85,73.85 88,62.7 99,73.7 99.1,73.8 88.1,84.8

## Keep-outs
Keep-Out Layer:
  lines w0.3: 5,106.85 22.1,106.85 22.1,116.9 ; 5,126.85 22.1,126.85 22.1,116.85
  lines w0.5: 5,106.8 5,126.75 4.95,126.8 22,126.8 22.1,126.7 22.1,106.85 ; 5,106.85 22.1,106.85 ; 44.5,108.05 50.9,108.05 ; 44.5,108.3 44.5,108.15 44.5,124.65 ; 44.5,124.75 51,124.75 ; 51,124.65 55,128.65 55,135 227.4,135 ; 51.05,108.1 55,104.2 55,0 ; 55,0.05 55.1,-0.05 227.5,-0.05 227.5,24.8 ; 227.5,24.9 239.95,24.9 ; 227.5,135 227.5,105.05 227.55,105 239.95,105 240,105.05 ; 240,25 240,105 ; 22.1,106.85 22.1,106.85 ; 0,0 0,135 42,135 42,0 0,0

## Silkscreen, mask and mechanical layers (free items; w line width, h text height)
Top Solder:
  rectangle: 110.15,105.4 127.4,121.5
Mechanical 1:
  drawing of 198 lines, arcs and shapes, not listed
Mechanical 3:
  lines w0.25: -51.44,-1.96 -49.75,-1.96 -49.75,-3.57
  lines w0.3: 91.4,92.85 91.4,99.6 119.7,99.6 119.7,92.85 ; 93.9,92.85 93.9,99.6 ; 104.4,-1.6 104.4,45.7 ; 117.2,92.85 117.2,99.6

## Text inside footprints (layer, text, board x,y; h text height)
Q2: Top Overlay "1" at 143.846,19.443 h1 r270; Top Overlay "3" at 143.846,15.115 h1 r270
Q3: Top Overlay "1" at 143.846,27.443 h1 r270; Top Overlay "3" at 143.846,23.115 h1 r270
Q4: Top Overlay "1" at 143.846,35.443 h1 r270; Top Overlay "3" at 143.846,31.115 h1 r270
Q7: Top Overlay "1" at 186.657,27.246 h1; Top Overlay "3" at 190.985,27.246 h1
Q100: Top Overlay "1" at 172.744,127.24 h1 r270; Top Overlay "3" at 172.744,122.912 h1 r270
Q101: Top Overlay "1" at 172.744,118.54 h1 r270; Top Overlay "3" at 172.744,114.212 h1 r270
U101: Top Overlay "1" at 130.378,110.592 h1 r90; Top Overlay "3" at 130.378,115.414 h1 r90
U104: Top Overlay "3" at 140.182,116.05 h1 r270; Top Overlay "1" at 140.182,120.293 h1 r270